# Altium PCB Relay_Mux.PcbDoc
Units mil, origin at the board's own origin, x right, y up, seen from the top; angles counter-clockwise.
Board outline 4325 x 2830 mil, 4 copper layers (Component Side, Ground Plane, Power Plane, Solder Side), stack 33.234 mil thick; 71 components, 99 nets, 327 pads, 30 vias.
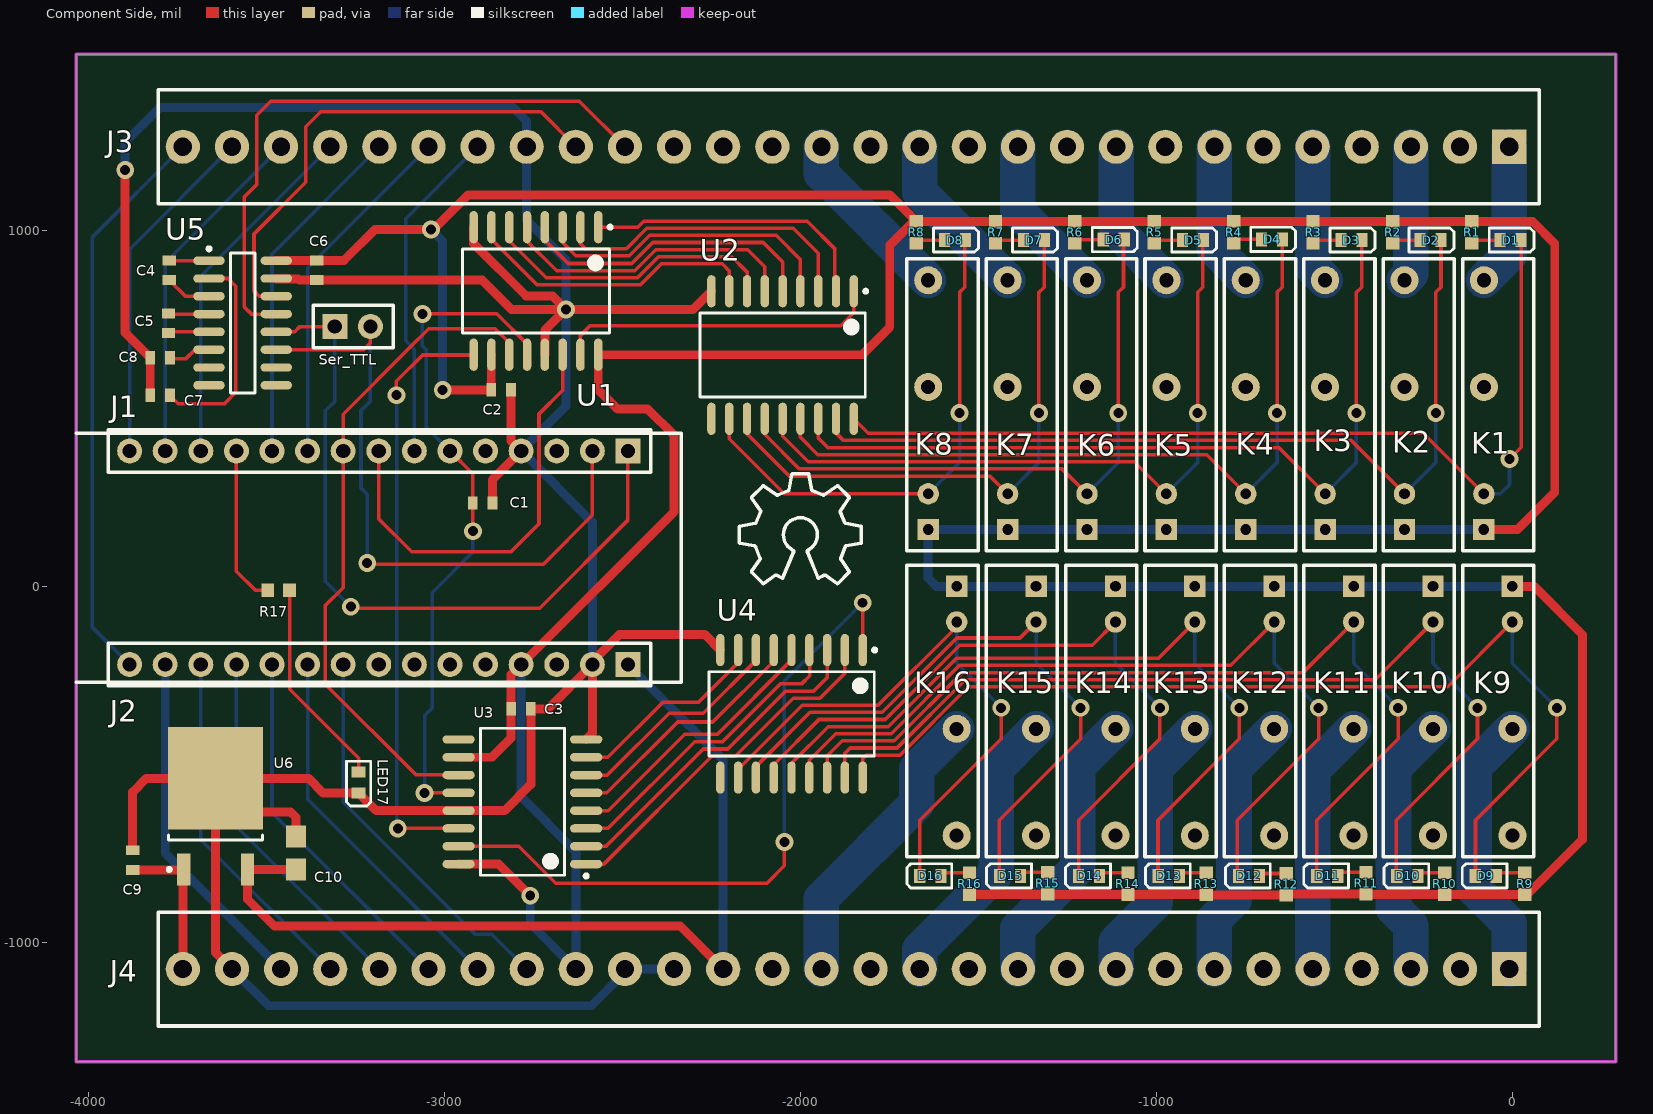
[diagram p0: Component Side view]
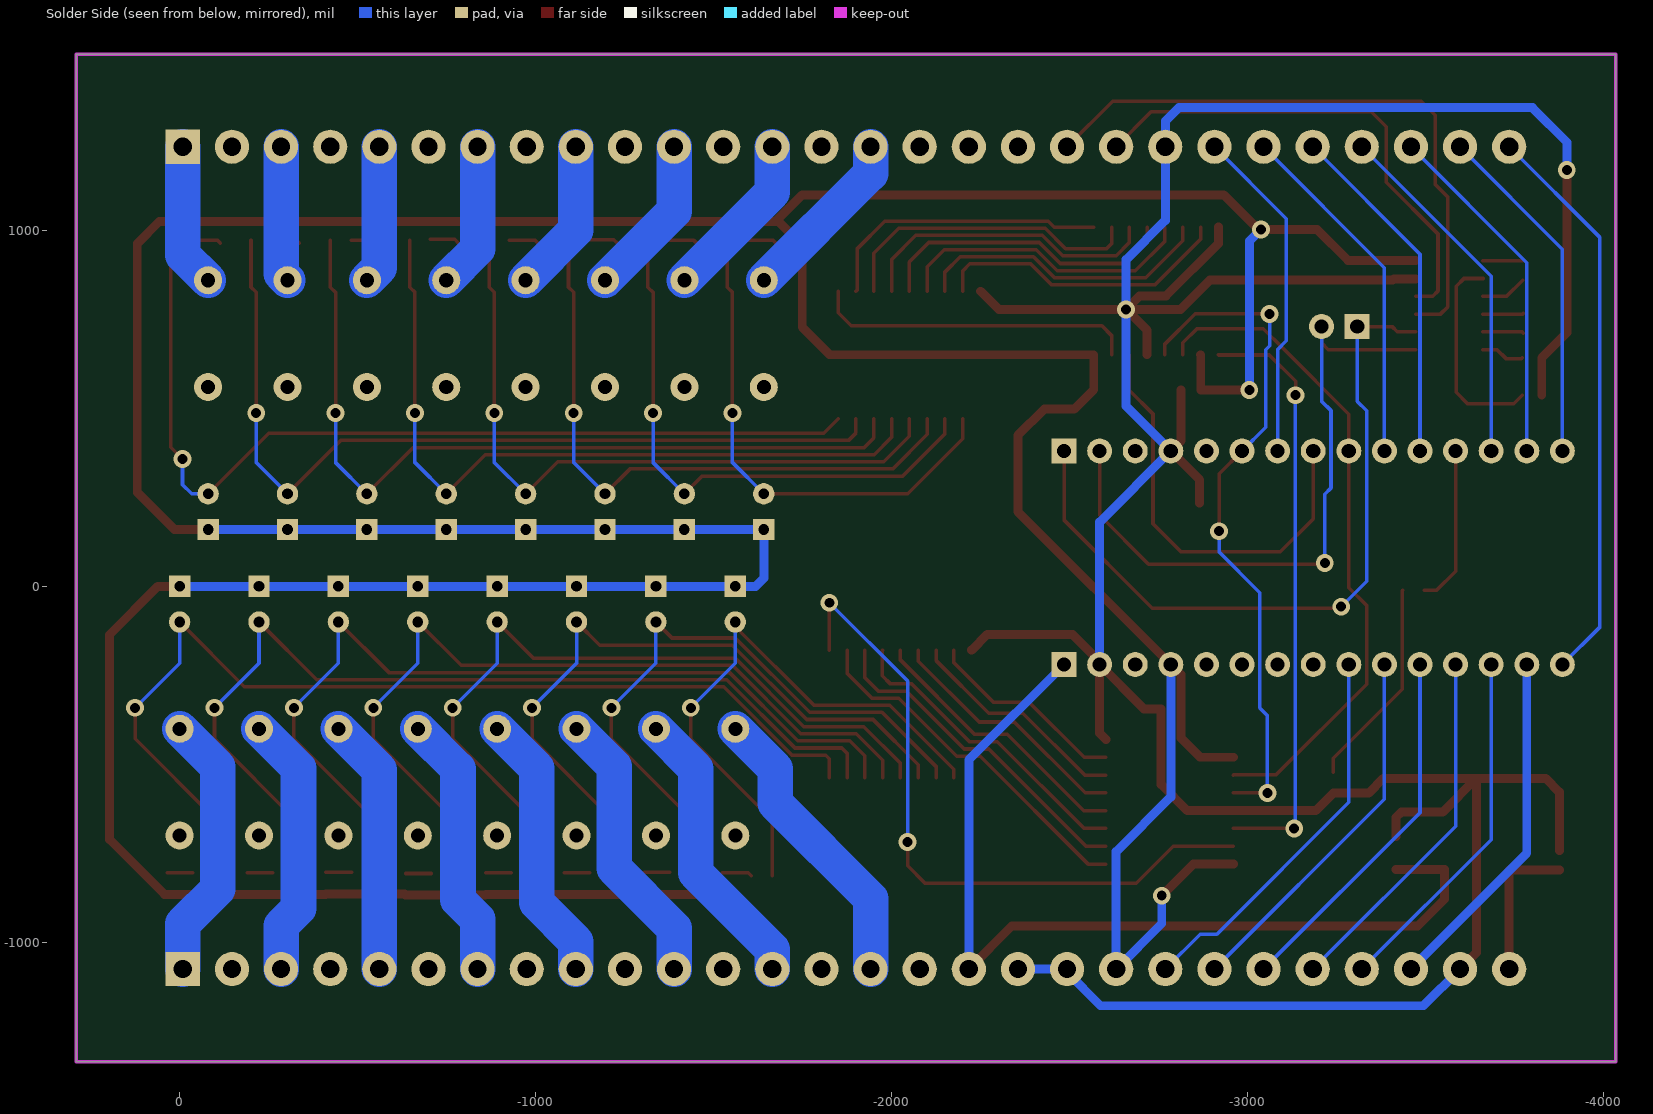
[diagram p1: Solder Side view, seen from below]
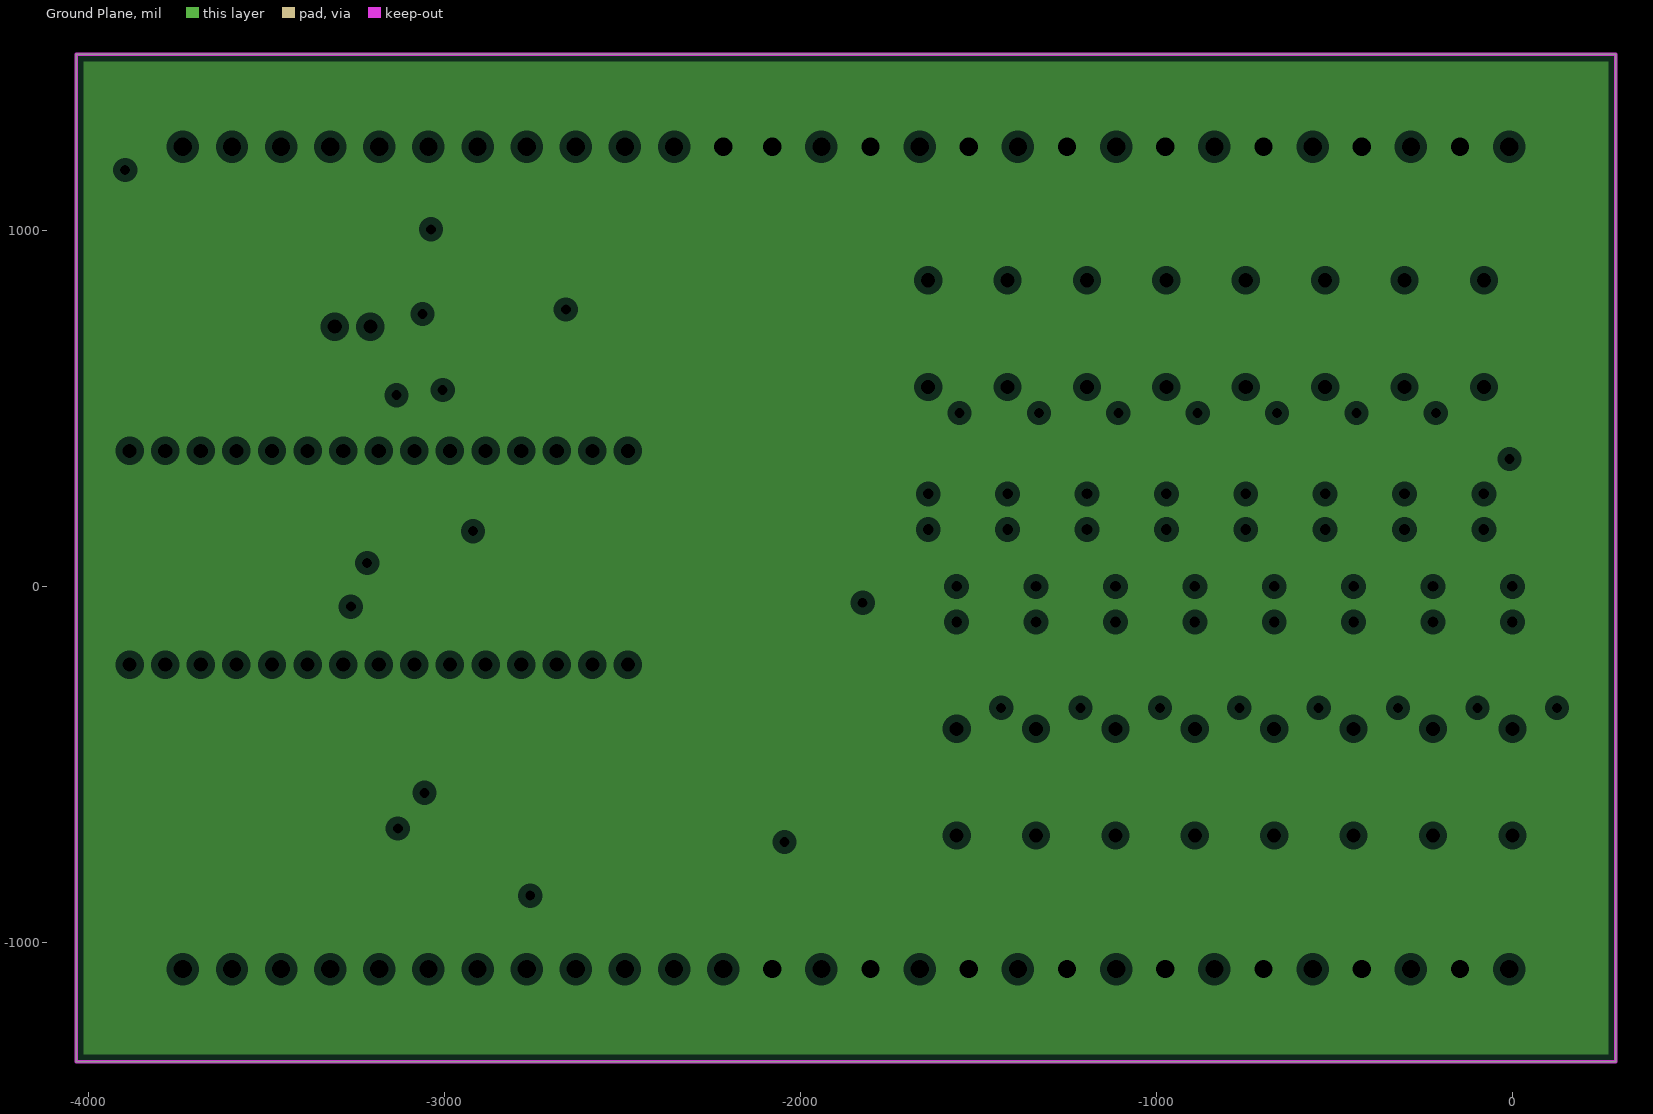
[diagram p2: Ground Plane, clearances drawn from the general rule]
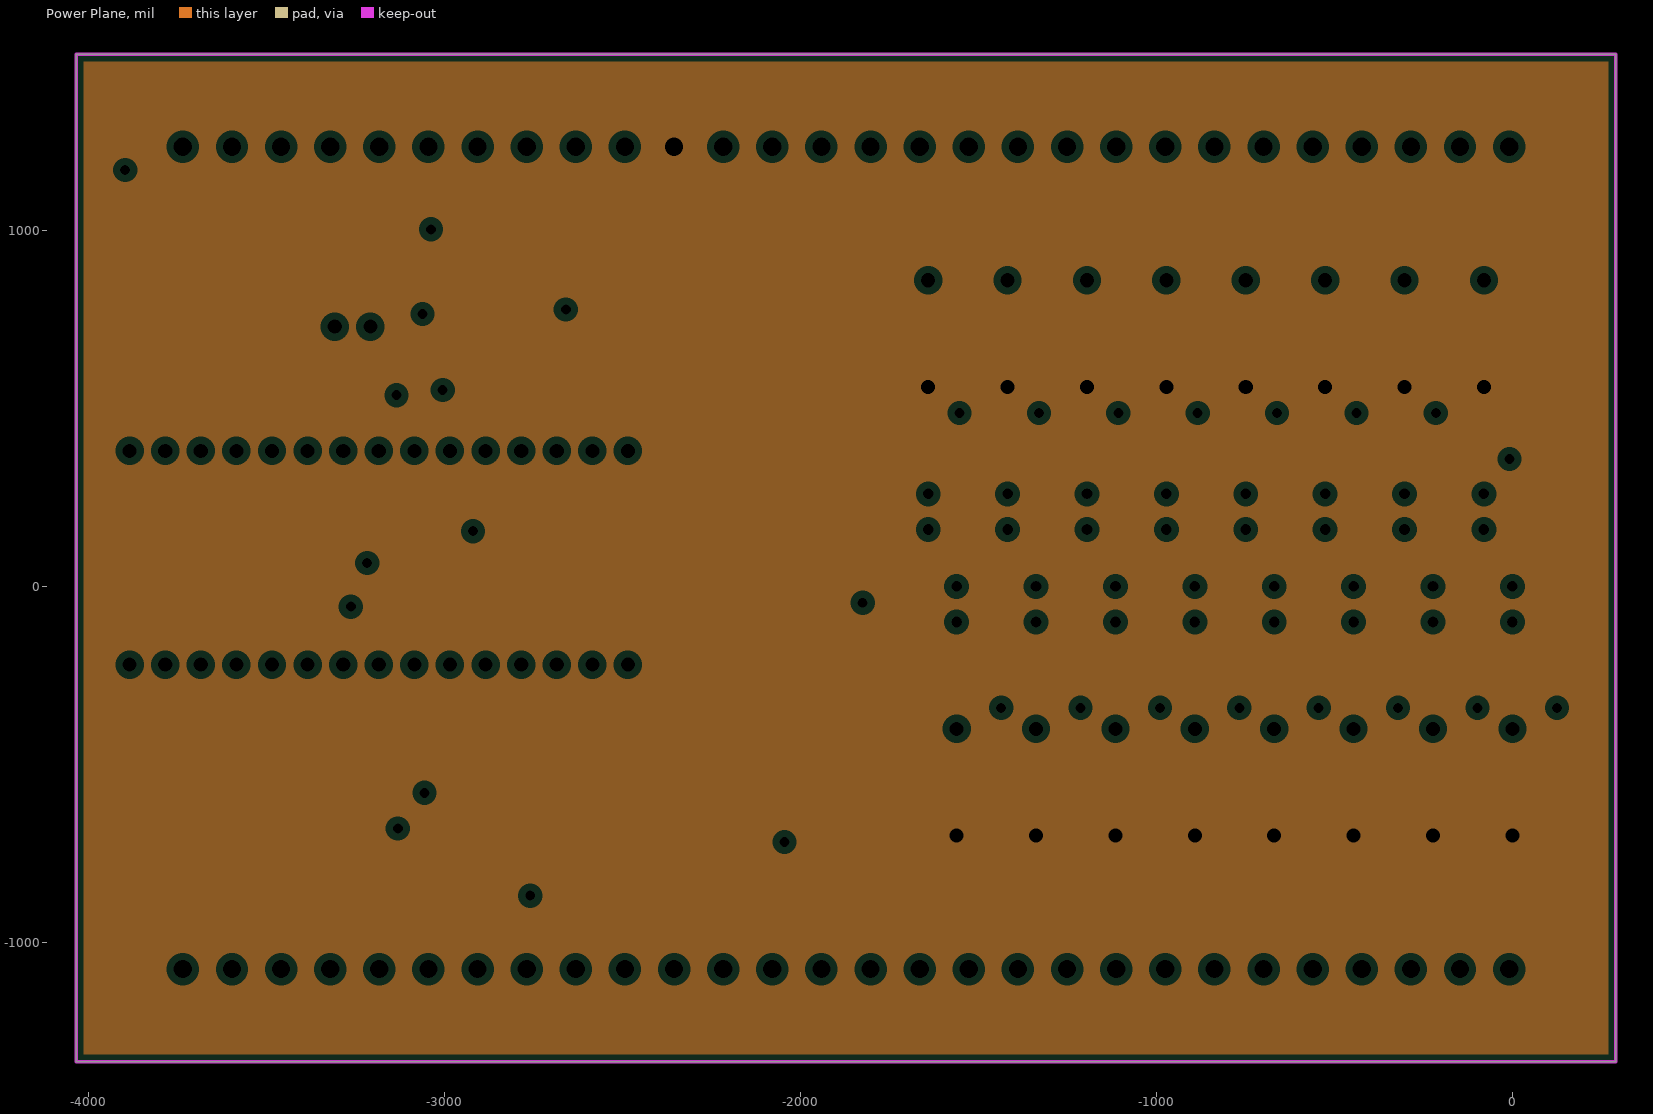
[diagram p3: Power Plane, clearances drawn from the general rule]

## Layer stack, top to bottom
Top Solder: solder mask 0.4, Solder Resist, Dk 3.5
Component Side: signal copper 1.4
Input: core 12.6, FR-4, Dk 4.8
Ground Plane: plane copper 1.417, net COM
Dielectric 3: prepreg 5, Dk 4.2
Power Plane: plane copper 1.417, net INPUT
Com: core 10, Dk 4.2
Solder Side: signal copper 1.4
Bottom Solder: solder mask 0.4, Solder Resist, Dk 3.5

## Board outline
-4034.5,-1335 -4034.5,1495 290.5,1495 290.5,-1335

## Design rules (kind name [scope] priority, off if disabled: settings)
Clearance [All] p1: gap=10
PlaneClearance [All] p1: clearance=20
PlaneConnect [All] p1: planeconnectstyle=Relief reliefexpansion=20 reliefentries=4 reliefconductorwidth=10 reliefairgap=10
PolygonConnect [All] p1: connectstyle=Relief reliefconductorwidth=10 reliefentries=4 polygonreliefangle="90 Angle" airgapwidth=10
RoutingVias [All] p1: holewidth=28 width=50 viastyle="Through Hole" minholewidth=28 minwidth=50 maxholewidth=28 maxwidth=50
SilkToBoardRegionClearance [InNet(Input)] p1:
SilkToSilkClearance [All] p1: silktosilkclearance=8
SolderMaskExpansion [All] p1: expansion=4
Width Width_serial [InNet('RS232TX')Or InNet('RS232RX')] p1: maxlimit=10 minlimit=10 preferedwidth=10
Width Width_Signal [InNet(OUT1)Or InNet(OUT2)Or InNet(OUT3)Or InNet(OUT4)Or InNet(OUT5)Or InNet(OUT6)Or InNet(OUT7)Or InNet(OUT8)Or InNet(OUT9)Or InNet(OUT10)Or InNet(OUT11)Or InNet(OUT12)Or InNet(OUT13)Or InNet(OUT14)Or InNet(OUT15)Or InNet(OUT16)Or InNet(Q0)Or InNet(Q1)Or InNet(Q2)Or InNet(Q3)Or InNet(Q4)Or InNet(Q5)Or InNet(Q6)Or InNet(Q7)Or InNet(Q8)Or InNet(Q9)Or InNet(Q10)Or InNet(Q11)Or InNet(Q12)Or InNet(Q13)Or InNet(Q14)Or InNet(Q15)Or InNet(NetD16_1)Or InNet(NetD15_1)Or InNet(NetD14_1)Or InNet(NetD13_1)Or InNet(NetD12_1)Or InNet(NetD11_1)Or InNet(NetD10_1)Or InNet(NetD9_1)Or InNet(NetD8_1)Or InNet(NetD7_1)Or InNet(NetD6_1)Or InNet(NetD5_1)Or InNet(NetD4_1)Or InNet(NetD3_1)Or InNet(NetD2_1)Or InNet(NetD1_1)Or InNet(D0)Or InNet(D1)Or InNet(D2)Or InNet(D3)Or InNet(D4)Or InNet(D5)Or InNet(D6)Or InNet(D7)Or InNet(D8)Or InNet(D9)Or InNet(D10)Or InNet(D11)Or InNet(D12)Or InNet(D13)Or InNet(D14)Or InNet(D15)Or InNet(SH_CP)Or InNet(ST_CP)Or InNet(DS)Or InNet(NetLED17_1)Or InNet(NetC7_1)Or InNet(NetC8_1)Or InNet(AREF)Or InNet(A0)Or InNet(A1)Or InNet(A2)Or InNet(A3)] p2: maxlimit=10 minlimit=10 preferedwidth=10
Width Width_Pwr [InNet(GND)Or InNet(VCC)Or InNet(VIN)] p3: maxlimit=25 minlimit=25 preferedwidth=25
Width Width_Contacts [InNet(Input)Or InNet(Com)Or InNet(Ch1)Or InNet(Ch2)Or InNet(Ch3)Or InNet(Ch4)Or InNet(Ch5)Or InNet(Ch6)Or InNet(Ch7)Or InNet(Ch8)Or InNet(Ch9)Or InNet(Ch10)Or InNet(Ch11)Or InNet(Ch10)Or InNet(Ch11)Or InNet(Ch12)Or InNet(Ch13)Or InNet(Ch14)Or InNet(Ch15)Or InNet(Ch16)] p4: maxlimit=100 minlimit=100 preferedwidth=100
25 further rules are at their usual default settings.

## Components (designator, comment, footprint, x,y, rotation, side; value= is the part's Value field where it differs from the comment)
C1 "Cap" 0603_Capacitor -2893,234 r180 top
C2 "Cap" 0603_Capacitor -2841,552 r180 top
C3 "Cap" 0603_Capacitor -2785,-344 r180 top
C4 "Cap" 0603_Capacitor -3773,888 r90 top
C5 "Cap" 0603_Capacitor -3775,739 r90 top
C6 "Cap" 0603_Capacitor -3359,888 r270 top
C7 "Cap" 0603_Capacitor -3799,537 r180 top
C8 "Cap" 0603_Capacitor -3799,642 r180 top
C9 "Cap" 0603_Capacitor -3876,-769 r90 top
C10 "Cap" 0805_cap_CAPC3013X10N -3417,-749 r90 top
D1 "LED3" LITE_ON_LED -5,973 r0 top
D2 "LED3" LITE_ON_LED -230,973 r0 top
D3 "LED3" LITE_ON_LED -452,973 r0 top
D4 "LED3" LITE_ON_LED -675,975 r0 top
D5 "LED3" LITE_ON_LED -897,973 r0 top
D6 "LED3" LITE_ON_LED -1120,974 r0 top
D7 "LED3" LITE_ON_LED -1344,973 r0 top
D8 "LED3" LITE_ON_LED -1566,973 r0 top
D9 "LED3" LITE_ON_LED -75,-813 r180 top
D10 "LED3" LITE_ON_LED -295,-813 r180 top
D11 "LED11" LITE_ON_LED -520,-813 r180 top
D12 "LED3" LITE_ON_LED -740,-813 r180 top
D13 "LED3" LITE_ON_LED -965,-813 r180 top
D14 "LED3" LITE_ON_LED -1189,-813 r180 top
D15 "LED3" LITE_ON_LED -1411,-813 r180 top
D16 "LED3" LITE_ON_LED -1635,-813 r180 top
J1 "J1_Nano" "J1, J2 - Arduino Nano" -3184.5,380.5 r270 top
J2 "J2_Nano" "J1, J2 - Arduino Nano" -3184.5,-219.5 r270 top
J3 "J3" Term_Block_Amphenol_20020327 -9,1235 r270 top
J4 "J4" Term_Block_Amphenol_20020327 -9,-1075 r270 top
K1 "K*" "Relay_G6DN-1A DC5" -80,860 r90 top
K2 "K*" "Relay_G6DN-1A DC5" -303,860 r90 top
K3 "K*" "Relay_G6DN-1A DC5" -526,860 r90 top
K4 "K*" "Relay_G6DN-1A DC5" -749,860 r90 top
K5 "K*" "Relay_G6DN-1A DC5" -972,860 r90 top
K6 "K*" "Relay_G6DN-1A DC5" -1195,860 r90 top
K7 "K*" "Relay_G6DN-1A DC5" -1418,860 r90 top
K8 "K*" "Relay_G6DN-1A DC5" -1641,860 r90 top
K9 "K*" "Relay_G6DN-1A DC5" 0,-700 r270 top
K10 "K*" "Relay_G6DN-1A DC5" -223,-700 r270 top
K11 "K*" "Relay_G6DN-1A DC5" -446,-700 r270 top
K12 "K*" "Relay_G6DN-1A DC5" -669,-700 r270 top
K13 "K*" "Relay_G6DN-1A DC5" -892,-700 r270 top
K14 "K*" "Relay_G6DN-1A DC5" -1115,-700 r270 top
K15 "K*" "Relay_G6DN-1A DC5" -1338,-700 r270 top
K16 "K*" "Relay_G6DN-1A DC5" -1561,-700 r270 top
LED17 "LED3" LITE_ON_LED -3241,-551 r270 top
R1 "Res3" 0603_Resistor -114,995 r270 top
R2 "Res3" 0603_Resistor -336,995 r270 top
R3 "Res3" 0603_Resistor -560,995 r270 top
R4 "Res3" 0603_Resistor -783,995 r270 top
R5 "Res3" 0603_Resistor -1006,995 r270 top
R6 "Res3" 0603_Resistor -1229,995 r270 top
R7 "Res3" 0603_Resistor -1452,995 r270 top
R8 "Res3" 0603_Resistor -1675,995 r270 top
R9 "Res3" 0603_Resistor 35,-835 r90 top
R10 "Res3" 0603_Resistor -190,-835 r90 top
R11 "Res3" 0603_Resistor -411,-834 r90 top
R12 "Res3" 0603_Resistor -635,-837 r90 top
R13 "Res3" 0603_Resistor -860,-835 r90 top
R14 "Res3" 0603_Resistor -1080,-835 r90 top
R15 "Res3" 0603_Resistor -1305,-834 r90 top
R16 "Res3" 0603_Resistor -1525,-835 r90 top
R17 "Res3" 0603_Resistor -3466,-11 r0 top
Ser_TTL "Ser_TTL" Ser_TTL -3308,730 r270 top
U1 "74HC595" 16Pin_SOIC127P1030X265-16N -2743,830 r270 top
U2 "ULN2803" 18Pin_SOIC127P1030X265-18N -2050,650 r270 top
U3 "74HC595" 16Pin_SOIC127P1030X265-16N -2781,-605 r180 top
U4 "ULN2803" 18Pin_SOIC127P1030X265-18N -2025,-358 r270 top
U5 "MAX3232" "16 pin SOIC - MAX3232 - SOIC127P600X175-16N" -3567,740 r0 top
U6 "MC78M12" "MC78M12 footprint - linear regulator - DPAK228P992X238-3N" -3643,-618 r90 top

## Footprints (in the part's own frame and the unit in brackets; to place one, negate y for a bottom-side part, rotate by r counter-clockwise, add the part's x,y. Pads: shape width x height; smd on the part's side, far side on the other; paste and mask are expansions set on the pad)
"16 pin SOIC - MAX3232 - SOIC127P600X175-16N" [mm] "SOIC, 16-Leads, Body 9.89x3.91mm, Pitch 1.27mm, IPC Medium Density"
  oval 2.25x0.6 smd: 1(-2.4,4.445) 2(-2.4,3.175) 3(-2.4,1.905) 4(-2.4,0.635) 5(-2.4,-0.635) 6(-2.4,-1.905) 7(-2.4,-3.175) 8(-2.4,-4.445) 9(2.4,-4.445) 10(2.4,-3.175) 11(2.4,-1.905) 12(2.4,-0.635) 13(2.4,0.635) 14(2.4,1.905) 15(2.4,3.175) 16(2.4,4.445)
  silkscreen extent -2.52,-5 0.87,5.42, body extent -2,-5 2,5, height 1.75
16Pin_SOIC127P1030X265-16N [mm] "SOIC, 16-Leads, Body 10.30x7.50mm, Pitch 1.27mm, IPC Medium Density"
  oval 2.3x0.6 smd: 1(-4.55,4.445) 2(-4.55,3.175) 3(-4.55,1.905) 4(-4.55,0.635) 5(-4.55,-0.635) 6(-4.55,-1.905) 7(-4.55,-3.175) 8(-4.55,-4.445) 9(4.55,-4.445) 10(4.55,-3.175) 11(4.55,-1.905) 12(4.55,-0.635) 13(4.55,0.635) 14(4.55,1.905) 15(4.55,3.175) 16(4.55,4.445)
  silkscreen extent -4.67,-5.25 3,5.42, body extent -3.8,-5.25 3.8,5.25, height 2.65
18Pin_SOIC127P1030X265-18N [mm] "SOIC, 18-Leads, Body 11.55x7.50mm, Pitch 1.27mm, IPC Medium Density"
  oval 2.3x0.6 smd: 1(-4.55,5.08) 2(-4.55,3.81) 3(-4.55,2.54) 4(-4.55,1.27) 5(-4.55,0) 6(-4.55,-1.27) 7(-4.55,-2.54) 8(-4.55,-3.81) 9(-4.55,-5.08) 10(4.55,-5.08) 11(4.55,-3.81) 12(4.55,-2.54) 13(4.55,-1.27) 14(4.55,0) 15(4.55,1.27) 16(4.55,2.54) 17(4.55,3.81) 18(4.55,5.08)
  silkscreen extent -4.67,-5.9 3,6.06, body extent -3.8,-5.9 3.8,5.9, height 2.65
0603_Capacitor [mm]
  rect 0.7x0.95 smd: 1(-0.7,0) 2(0.7,0)
  body extent -0.83,-0.43 0.82,0.43, height 0.6
0603_Resistor [mm]
  rect 0.9x0.95 smd: 1(-0.775,0) 2(0.775,0)
  body extent -0.87,-0.47 0.88,0.48, height 0.6
0805_cap_CAPC3013X10N [mm] "Chip Capacitor, 2-Leads, Body 3.00x1.27mm, IPC Medium Density"
  rect 1.55x1.45 smd: 1(-1.175,0) 2(1.175,0)
  body extent -1.55,-0.7 1.55,0.7, height 1
"J1, J2 - Arduino Nano" [mil]
  rect 70x70 hole 40: 1(0,700)
  round 70 hole 40: 2(0,600) 3(0,500) 4(0,400) 5(0,300) 6(0,200) 7(0,100) 8(0,0) 9(0,-100) 10(0,-200) 11(0,-300) 12(0,-400) 13(0,-500) 14(0,-600) 15(0,-700)
  silkscreen extent -60,-760 60,764
LITE_ON_LED [mm]
  rect 0.8x1 smd: 1(-0.75,0) 2(0.75,0)
  silkscreen extent -1.52,-0.86 1.68,0.86
"MC78M12 footprint - linear regulator - DPAK228P992X238-3N" [mm] "D-PAK, 3-Pads, Body 6.21x6.73mm (max), IPC Medium Density"
  rect 2.3x0.95 smd: 1(-4.5,2.28) 3(-4.5,-2.28)
  rect 7.3x6.8 smd: 2(2,0)
  silkscreen extent -4.62,-3.35 -2.05,3.43, body extent -2.4,-3.37 3.82,3.37, height 2.38
"Relay_G6DN-1A DC5" [mil]
  rect 60x60 hole 30: 1(-700,0)
  round 60 hole 30: 2(-600,0)
  round 78.74 hole 39.37: 5(-300,0) 8(0,0)
  silkscreen extent -760,-140 60,60
Ser_TTL [mil]
  rect 70x70 hole 40: 1(0,0)
  round 70 hole 40: 2(0,100)
  silkscreen extent -60,-60 60,164
Term_Block_Amphenol_20020327 [mil] "24 pos, 3.81 mm pitch, screw term"
  rect 96x96 hole 51: 1(0,0)
  round 96 hole 51: 2(0,-138) 3(0,-276) 4(0,-414) 5(0,-552) 6(0,-690) 7(0,-828) 8(0,-966) 9(0,-1104) 10(0,-1242) 11(0,-1380) 12(0,-1518) 13(0,-1656) 14(0,-1794) 15(0,-1932) 16(0,-2070) 17(0,-2208) 18(0,-2346) 19(0,-2484) 20(0,-2622) 21(0,-2760) 22(0,-2898) 23(0,-3036) 24(0,-3174) 25(0,-3312) 26(0,-3450) 27(0,-3588) 28(0,-3726)
  silkscreen extent -160,-3795 160,84

## Part data
C1 C2 C3 C4 C5 C6 C7 C8 C9 C10: "Capacitor"
D1 D2 D3 D4 D5 D6 D7 D8 D9 D10 D12 D13 D14 D15 D16 LED17: "Typical BLUE SiC LED"
D11: library part LED3, "Typical BLUE SiC LED"
J1: library part J1, "J1 on Arduino Nano"
J2: library part J2, "J2 on Arduino Nano"
K1 K2 K3 K4 K5 K6 K7 K8 K9 K10 K11 K12 K13 K14 K15 K16: library part "Relay_G6DN-1A DC5", "Relay, SPST, 5V"
R1 R2 R3 R4 R5 R6 R7 R8 R9 R10 R11 R12 R13 R14 R15 R16 R17: "Resistor"
U6: library part "Volt Reg", "Voltage Regulator"

## Via types
v1: diameter 50, hole 28, Component Side to Solder Side, 30 vias

## Nets (pads, with @x,y where several pads share a name; then routed paths per layer and width w, separated by ;. In a path a pad name is that pad's centre, name@x,y a point inside that pad or via, vN(x,y) a via of type N, cw(c..) or ccw(c..) an arc to the next point about the centre after c; other vN are vias at no path point)
3V3: J2.14 J4.26 | length 990.3
  Solder Side w25: J2.14 -3784.5,-749.5 J4.26
A0: J2.12 J4.24 | length 1021.8
  Solder Side w10: J2.12 -3584.5,-673.5 J4.24
A1: J2.11 J4.23 | length 1037.5
  Solder Side w10: J2.11 -3484.5,-635.5 J4.23
A2: J2.10 J4.22 | length 1053.3
  Solder Side w10: J2.10 -3384.5,-597.5 J4.22
A3: J2.9 J4.21 | length 1096.6
  Solder Side w10: J2.9 -3284.5,-606.5 -2914,-977 -2867,-977 J4.21
AREF: J2.13 J4.25 | length 1006.1
  Solder Side w10: J2.13 -3684.5,-711.5 J4.25
CH1: J3.1 K1.8 | length 404.4
  Solder Side w100: K1.8 -9,931 J3.1
CH2: J3.3 K2.8 | length 382.5
  Solder Side w100: K2.8 -285,878 J3.3
CH3: J3.5 K3.8 | length 389.5
  Solder Side w100: J3.5 -561,895 K3.8
CH4: J3.7 K4.8 | length 411.5
  Solder Side w100: J3.7 -837,948 K4.8
CH5: J3.9 K5.8 | length 433.4
  Solder Side w100: J3.9 -1113,1001 K5.8
CH6: J3.11 K6.8 | length 455.4
  Solder Side w100: J3.11 -1389,1054 K6.8
CH7: J3.13 K7.8 | length 477.3
  Solder Side w100: J3.13 -1665,1107 K7.8
CH8: J3.15 K8.8 | length 499.3
  Solder Side w100: J3.15 -1941,1160 K8.8
CH9: J4.1 K9.5 | length 759.9
  Solder Side w100: J4.1 -9,-948 -107,-850 -107,-507 K9.5
CH10: J4.3 K10.5 | length 741.3
  Solder Side w100: J4.3 -285,-953 -334,-904 -334,-511 K10.5
CH11: J4.5 K11.5 | length 722.6
  Solder Side w100: J4.5 -561,-515 K11.5
CH12: J4.7 K12.5 | length 744.6
  Solder Side w100: J4.7 -837,-935 -782,-880 -782,-513 K12.5
CH13: J4.9 K13.5 | length 766.5
  Solder Side w100: J4.9 -1113,-998 -1003,-888 -1003,-511 K13.5
CH14: J4.11 K14.5 | length 788.5
  Solder Side w100: J4.11 -1389,-960 -1221,-792 -1221,-506 K14.5
CH15: J4.13 K15.5 | length 810.4
  Solder Side w100: J4.13 -1665,-1020 -1450,-805 -1450,-512 K15.5
CH16: J4.15 K16.5 | length 832.4
  Solder Side w100: J4.15 -1941,-877 -1673,-609 -1673,-512 K16.5
COM: J3.2 J3.4 J3.6 J3.8 J3.10 J3.12 J3.14 J3.16 J3.17 J4.2 J4.4 J4.6 J4.8 J4.10 J4.12 J4.14 J4.16
D0: J1.2 Ser_TTL.2 U5.11 | length 1872.7
  Component Side w10: U5.11 -3227,665 -3208,684 Ser_TTL.2 ; v1(-3217,66) -3213,62 -2722,62 -2584.5,199.5 J1.2
  Solder Side w10: v1(-3217,66) -3217,259 -3234.5,276.5 -3234.5,494 -3208,520.5 Ser_TTL.2
D1: J1.1 Ser_TTL.1 U5.12 | length 2073.3
  Component Side w10: U5.12 -3421,715 -3406,730 Ser_TTL.1 ; v1@-3263,-61 -2732,-61 -2484.5,186.5 J1.1
  Solder Side w10: Ser_TTL.1 -3308,519.5 -3334.5,493 -3334.5,14.5 v1(-3263,-57)
D4: J1.7 J3.22 | length 948.3
  Solder Side w10: J1.7 -3084.5,665.5 -3109,690 -3109,1033 J3.22
D7: J1.10 J3.23 | length 995.1
  Solder Side w10: J1.10 -3384.5,895.5 J3.23
D8: J1.11 J3.24 | length 979.4
  Solder Side w10: J1.11 -3484.5,933.5 J3.24
D9: J1.12 R17.1 | length 448.2
  Component Side w10: J1.12 -3584.5,42.5 -3531,-11 R17.1
D10: J1.13 J3.25 | length 1005.1
  Solder Side w10: J1.13 -3684.5,871.5 J3.25
D11: J1.14 J3.26 | length 989.3
  Solder Side w10: J1.14 -3784.5,909.5 J3.26
D12: J1.15 J3.27 | length 973.6
  Solder Side w10: J1.15 -3884.5,947.5 J3.27
D13: J2.15 J3.28 | length 1603.8
  Solder Side w10: J2.15 -3990,-114 -3990,980 J3.28
DS: J1.8 U1.14 | length 1214.7
  Component Side w10: J1.8 -3184.5,189.5 -3092,97 -2813,97 -2734.5,175.5 -2734.5,484.5 -2668,551 U1.14
GND: C1.1 C2.1 C3.1 C6.2 C7.2 C8.2 C9.2 C10.2 J1.4 J2.2 J3.21 J4.18 J4.19 J4.27 LED17.2 U1.8 U1.13 U2.9 U3.8 U3.13 U4.9 U5.15 U6.2 | length 10458.1
  Component Side w25: v1@-3898,1170 -3898,713.44 C8.2 C7.2 ; C9.2 -3876,-578 -3837.26,-539.26 U6.2 ; J4.27 -3643,-1029 U6.2 ; U5.15@-3471.51,864 -3411,864 -3407.44,860.44 C6.2 -2894.44,860.44 -2812,778 v1(-2659,778) ; C10.2 -3417,-649 -3432,-634 -3548.26,-634 U6.2 ; U1.8 -2918,963 -2771,816 -2697,816 v1(-2659,778) ; C1.1 -2865.44,299.56 J1.4 -2813.44,409.44 C2.1 ; U1.13 -2718,719 v1(-2659,778) ; U3.8 -2584.5,-412.63 J2.2 ; U2.9 -2301.13,778 v1(-2659,778) ; U4.9 -2268.87,-135 -2508,-135 -2584.5,-211.5 J2.2 ; U6.2 -3381.74,-539.26 -3340.47,-580.53 LED17.2 -3191.53,-630 U3.13 -2831,-630 -2757.44,-556.44 C3.1 -2709,-344 J2.2
  Solder Side w25: v1(-3897,1170) -3898,1171 -3898,1247 -3800,1345 -2807,1345 -2769,1307 J3.21 -2769,1028 -2659,918 v1(-2659,778) -2659,506 J1.4 -2584.5,180.5 J2.2 ; J4.27 -3494,-1178 -2587,-1178 -2493,-1084 J4.19 J4.18
INPUT: J3.18 K1.5 K2.5 K3.5 K4.5 K5.5 K6.5 K7.5 K8.5 K9.8 K10.8 K11.8 K12.8 K13.8 K14.8 K15.8 K16.8
NetC4_1: C4.1 U5.3 | length 130.3
  Component Side w10: C4.1 -3727.56,815 U5.3
NetC4_2: C4.2 U5.1 | length 111.7
  Component Side w10: C4.2 -3772.44,915 U5.1
NetC5_1: C5.1 U5.5 | length 115
  Component Side w10: C5.1 -3771.44,715 U5.5
NetC5_2: C5.2 U5.4 | length 114.2
  Component Side w10: C5.2 -3773.44,765 U5.4
NetC7_1: C7.1 U5.2 | length 591.2
  Component Side w10: C7.1 -3747.44,513 -3618,513 -3586,545 -3586,843 -3608,865 U5.2
NetC8_1: C8.1 U5.6 | length 121.1
  Component Side w10: C8.1 -3769.44,640 -3726,640 -3701,665 U5.6
NetD1_1: D1.1 R1.2 | length 83
  Component Side w10: R1.2 -105.48,973 D1.1
NetD2_1: D2.1 R2.2 | length 80
  Component Side w10: R2.2 -327.48,973 D2.1
NetD3_1: D3.1 R3.2 | length 82
  Component Side w10: R3.2 -551.48,973 D3.1
NetD4_1: D4.1 R4.2 | length 82.8
  Component Side w10: R4.2 -772.48,975 D4.1
NetD5_1: D5.1 R5.2 | length 83
  Component Side w10: R5.2 -997.48,973 D5.1
NetD6_1: D6.1 R6.2 | length 83.4
  Component Side w10: R6.2 -1219.48,974 D6.1
NetD7_1: D7.1 R7.2 | length 82
  Component Side w10: R7.2 -1443.48,973 D7.1
NetD8_1: D8.1 R8.2 | length 83
  Component Side w10: R8.2 -1666.48,973 D8.1
NetD9_1: D9.1 R9.2 | length 72
  Component Side w10: D9.1@-36.96,-804.49 R9.2
NetD10_1: D10.1 R10.2 | length 72
  Component Side w10: D10.1@-261.96,-804.49 R10.2
NetD11_1: D11.1 R11.2 | length 72
  Component Side w10: D11.1@-482.96,-803.49 R11.2
NetD12_1: D12.1 R12.2 | length 72
  Component Side w10: D12.1@-706.96,-806.49 R12.2
NetD13_1: D13.1 R13.2 | length 72
  Component Side w10: D13.1@-931.96,-804.49 R13.2
NetD14_1: D14.1 R14.2 | length 72
  Component Side w10: D14.1@-1151.96,-804.49 R14.2
NetD15_1: D15.1 R15.2 | length 72
  Component Side w10: D15.1@-1376.96,-803.49 R15.2
NetD16_1: D16.1 R16.2 | length 84
  Component Side w10: D16.1 -1596.96,-804.49 R16.2
NetLED17_1: LED17.1 R17.2 | length 591
  Component Side w10: R17.2 -3434.5,-11.98 -3434.5,-288.98 -3241,-482.48 LED17.1
NetU1_9: U1.9 U3.14 | length 1676.3
  Component Side w10: v1(-3135,537) -3135,576 -3061,650 -2918.87,650 U1.9 ; v1(-3131,-680) U3.14
  Solder Side w10: v1@-3134.5,537 -3134.5,-676.5 v1(-3131,-680)
OUT1: D1.2 K1.2 U2.18 | length 2640.6
  Component Side w10: U2.18 -1809.13,430 -250,430 K1.2 ; v1(-8,358) 24.53,390.53 D1.2
  Solder Side w10: K1.2 -34,260 -8,286 v1(-8,358)
OUT2: D2.2 K2.2 U2.17 | length 2463.2
  Component Side w10: U2.17 -1900,431 -1879,410 -453,410 K2.2 ; v1(-215,487) -215,826 -200.47,840.53 D2.2
  Solder Side w10: K2.2 -215,348 v1(-215,487)
OUT3: D3.2 K3.2 U2.16 | length 2298.4
  Component Side w10: U2.16 -1950,417 -1923,390 -656,390 K3.2 ; v1(-438,487) -438,826 -423.47,840.53 D3.2@-423.47,973
  Solder Side w10: K3.2 -438,348 v1(-438,487)
OUT4: D4.2 K4.2 U2.15 | length 2124.2
  Component Side w10: U2.15 -2000,419 -1951,370 -859,370 K4.2 ; v1(-661,487) -661,826 -646.47,840.53 D4.2@-646.47,973
  Solder Side w10: K4.2 -661,348 v1(-661,487)
OUT5: D5.2 K5.2 U2.14 | length 1949.4
  Component Side w10: U2.14 -2050,422 -1978,350 -1062,350 K5.2 ; v1(-884,487) -884,826 -869.47,840.53 D5.2@-869.47,973
  Solder Side w10: K5.2 -884,348 v1(-884,487)
OUT6: D6.2 K6.2 U2.13 | length 1773.5
  Component Side w10: U2.13 -2100,427 -2003,330 -1265,330 K6.2 ; v1(-1107,487) -1107,826 -1092.47,840.53 D6.2@-1092.47,973
  Solder Side w10: K6.2 -1107,348 v1(-1107,487)
OUT7: D7.2 K7.2 U2.12 | length 1599.3
  Component Side w10: U2.12 -2150,429 -2031,310 -1468,310 K7.2 ; v1(-1330,487) -1330,826 -1315.47,840.53 D7.2@-1315.47,973
  Solder Side w10: K7.2 -1330,348 v1(-1330,487)
OUT8: D8.2 K8.2 U2.11 | length 1435.3
  Component Side w10: U2.11 -2200,415 -2045,260 K8.2 ; v1(-1553,487) -1553,826 -1538.47,840.53 D8.2@-1538.47,973 ; D8.2@-1537,972.47 D8.2
  Solder Side w10: K8.2 -1553,348 v1(-1553,487)
OUT9: D9.2 K9.2 U4.18 | length 2896.6
  Component Side w10: U4.18 -1825,-484 -1815,-474 -1720.29,-474 -1528.29,-282 -182,-282 K9.2 ; D9.2@-103.53,-813 -103.53,-656.53 125,-428 v1(125,-341)
  Solder Side w10: K9.2 0,-216 v1(125,-341)
OUT10: D10.2 K10.2 U4.17 | length 2732.4
  Component Side w10: U4.17 -1875,-469 -1860,-454 -1728.58,-454 -1536.58,-262 -385,-262 K10.2 ; D10.2@-326.53,-813 -326.53,-656.53 -98,-428 v1(-98,-341)
  Solder Side w10: K10.2 -223,-216 v1(-98,-341)
OUT11: D11.2 K11.2 U4.16 | length 2555.3
  Component Side w10: U4.16 -1925,-476 -1883,-434 -1736.86,-434 -1544.86,-242 -588,-242 K11.2 ; D11.2 -549.53,-656.53 -321,-428 v1(-321,-341)
  Solder Side w10: K11.2 -446,-216 v1(-321,-341)
OUT12: D12.2 K12.2 U4.15 | length 2375.3
  Component Side w10: U4.15 -1975,-488 -1901,-414 -1745.15,-414 -1553.15,-222 -791,-222 K12.2 ; D12.2@-772.53,-813 -772.53,-656.53 -544,-428 v1(-544,-341)
  Solder Side w10: K12.2 -669,-216 v1(-544,-341)
OUT13: D13.2 K13.2 U4.14 | length 2197
  Component Side w10: U4.14 -2025,-497 -1922,-394 -1753.43,-394 -1561.43,-202 -994,-202 K13.2 ; D13.2@-995.53,-813 -995.53,-656.53 -767,-428 v1(-767,-341)
  Solder Side w10: K13.2 -892,-216 v1(-767,-341)
OUT14: D14.2 K14.2 U4.13 | length 2021.7
  Component Side w10: U4.13 -2075,-501 -1948,-374 -1761.72,-374 -1552.72,-165 -1180,-165 K14.2 ; D14.2 -1218.53,-656.53 -990,-428 v1(-990,-341)
  Solder Side w10: K14.2 -1115,-216 v1(-990,-341)
OUT15: D15.2 K15.2 U4.12 | length 1845.7
  Component Side w10: U4.12 -2125,-506 -1973,-354 -1770,-354 -1561,-145 -1383,-145 K15.2 ; D15.2@-1441.53,-813 -1441.53,-656.53 -1213,-428 v1(-1213,-341)
  Solder Side w10: K15.2 -1338,-216 v1(-1213,-341)
OUT16: D16.2 K16.2 U4.11 | length 1675.7
  Component Side w10: U4.11 -2175,-514 -1995,-334 -1782,-334 -1561,-113 K16.2 ; D16.2 -1664.53,-656.53 -1436,-428 v1(-1436,-341)
  Solder Side w10: K16.2 -1561,-216 v1(-1436,-341)
Q0: U1.15 U2.1 | length 908.8
  Component Side w10: U1.15 -2618,705 -2591,732 -1887,732 -1850,769 U2.1
Q1: U1.1 U2.2 | length 824.4
  Component Side w10: U1.1 -2456.85,1009.13 -2439.99,1026 -1981,1026 -1903,948 -1903,832.13 U2.2
Q2: U1.2 U2.3 | length 879.5
  Component Side w10: U1.2 -2618,963 -2603.86,948.86 -2488.84,948.86 -2431.7,1006 -2020,1006 -1950,936 U2.3
Q3: U1.3 U2.4 | length 867.2
  Component Side w10: U1.3 -2668,966 -2630.86,928.86 -2480.56,928.86 -2423.42,986 -2068,986 -2000,918 U2.4
Q4: U1.4 U2.5 | length 860.6
  Component Side w10: U1.4 -2718,973 -2652,907 -2474.13,907 -2415.13,966 -2104.87,966 -2050,911.13 U2.5
Q5: U1.5 U2.6 | length 854.7
  Component Side w10: U1.5 -2768,970 -2685,887 -2465.85,887 -2406.85,946 -2148,946 -2100,898 U2.6
Q6: U1.6 U2.7 | length 845.4
  Component Side w10: U1.6 -2818,971 -2714,867 -2457.57,867 -2398.57,926 -2192.87,926 -2150,883.13 U2.7
Q7: U1.7 U2.8 | length 844.7
  Component Side w10: U1.7 -2868,975 -2740,847 -2449.28,847 -2390.28,906 -2220,906 -2200,886 U2.8
Q8: U3.15 U4.1 | length 1941.5
  Component Side w10: U3.15 -2791,-730 -2687,-834 -2094,-834 -2045,-785 v1(-2045,-718) ; U4.1 v1(-1825,-46)
  Solder Side w10: v1(-2045,-718) -2045,-266 v1(-1825,-46)
Q9: U3.1 U4.2 | length 1014
  Component Side w10: U3.1 -2552,-780 -2248.86,-476.86 -2182.86,-476.86 -2020,-314 -1945,-314 -1875,-244 U4.2
Q10: U3.2 U4.3 | length 950.3
  Component Side w10: U3.2 -2546,-730 -2272.86,-456.86 -2203.86,-456.86 -2041,-294 -1963,-294 -1925,-256 U4.3
Q11: U3.3 U4.4 | length 878.1
  Component Side w10: U3.3 -2541,-680 -2297.19,-436.19 -2218.76,-436.19 -2056.57,-274 -1997,-274 -1974,-251 -1974,-179.87 U4.4
Q12: U3.4 U4.5 | length 780.2
  Component Side w10: U3.4 -2540,-630 -2325,-415 -2233,-415 -2025,-207 U4.5
Q13: U3.5 U4.6 | length 711.3
  Component Side w10: U3.5 -2544,-580 -2345,-381 -2246,-381 -2075,-210 U4.6
Q14: U3.6 U4.7 | length 639.4
  Component Side w10: U3.6 -2543,-530 -2369,-356 -2273,-356 -2125,-208 U4.7
Q15: U3.7 U4.8 | length 572.2
  Component Side w10: U3.7 -2541,-480 -2387,-326 -2287,-326 -2175,-214 U4.8
RS232RX: J3.20 U5.14 | length 1406.8
  Component Side w10: U5.14 -3520,815 -3535,830 -3535,990 -3390,1135 -3390,1291 -3348,1333 -2729,1333 J3.20
RS232TX: J3.19 U5.13 | length 1754.4
  Component Side w10: U5.13 -3542,765 -3562,785 -3562,1094 -3527,1129 -3527,1324 -3488,1363 -2621,1363 J3.19
SH_CP: J1.9 U1.11 U3.11 | length 1874.9
  Component Side w10: U3.11 -2961.13,-529 -3080,-529 -3334.5,-274.5 -3334.5,-53.5 -3284.5,-3.5 J1.9 -3284.5,483.78 -3098.28,670 -3098,670 -3044,724 -2858,724 -2818,684 U1.11
ST_CP: C1.2 J1.6 U1.12 U3.12 | length 1915.4
  Component Side w10: v1@-3062,766 -2853,766 -2768,681 U1.12 ; v1(-3056,-580) U3.12 ; J1.6 -2920.56,316.56 C1.2 -2920.56,155.56 v1(-2920,155)
  Solder Side w10: v1(-3062,765) -3062,676 -3051,665 -3051,447 J1.6 ; v1(-3056,-580) -3056,-363 -3034.5,-341.5 -3034.5,-17.5 -2920,97 v1(-2920,155)
VCC: C2.2 C3.2 C6.1 J2.4 J4.20 K1.1 K2.1 K3.1 K4.1 K5.1 K6.1 K7.1 K8.1 K9.1 K10.1 K11.1 K12.1 K13.1 K14.1 K15.1 K16.1 R1.1 R2.1 R3.1 R4.1 R5.1 R6.1 R7.1 R8.1 R9.1 R10.1 R11.1 R12.1 R13.1 R14.1 R15.1 R16.1 U1.10 U1.16 U3.10 U3.16 U5.16 | length 15518.1
  Component Side w25: U5.16 -3359.56,915 C6.1 -3282.44,915.56 -3195,1003 v1(-3038,1003) -3030,1003 -2933,1100 -1749.49,1100 R8.1 ; v1(-3005,552) C2.2 -2868.56,650.31 U1.10 ; U3.16 -2848,-780 v1(-2759,-869) ; U3.10 -2867,-480 -2812.56,-425.56 C3.2 -2812.56,-247.56 J2.4 -2355,210 -2355,424 -2429,498 -2513,498 -2568,553 U1.16 -1826.13,650.87 -1749,728 -1749,958.72 -1682.21,1025.51 R8.1 ; J4.20@-2644,-1075 J4.20 ; R16.1 R14.1 R13.1 -858,-867.51 R12.1 -632,-864.51 R11.1 -410,-865.51 R10.1 R9.1 42.21,-865.51 197,-710.72 197,-136 61,0 K9.1 ; K1.1 15,160 119,264 119,963 56.49,1025.51 R1.1 R2.1 R3.1 R4.1 R5.1 R6.1 R7.1 R8.1
  Solder Side w25: v1(-3038,1003) -3005,970 v1(-3005,552) ; J2.4 -2784.5,-591.5 -2631,-745 J4.20 -2759,-947 v1(-2759,-869) ; K1.1 K2.1 K3.1 K4.1 K5.1 K6.1 K7.1 K8.1 -1642,159 -1642,24 -1618,0 K16.1 K15.1 K14.1 K13.1 K12.1 K11.1 K10.1 K9.1
VIN: C10.1 J2.1 J4.17 U6.3 | length 2603.7
  Component Side w25: C10.1 -3553.14,-795.26 U6.3 -3553.24,-878.76 -3478,-954 -2338,-954 J4.17
  Solder Side w25: J2.1 -2217,-487 J4.17
VIN_(24V): C9.1 J4.28 U6.1 | length 418.9
  Component Side w25: C9.1 -3735.84,-796.56 -3735,-797.4 J4.28
pads on no net: J1.3 J1.5 J2.3 J2.5 J2.6 J2.7 J2.8 U2.10 U3.9 U4.10 U5.7 U5.8 U5.9 U5.10

## Polygon pours and split planes (outlines as drawn)
COM on Ground Plane (split plane): 270.4,-1314.9 -4014.4,-1314.9 -4014.4,1474.9 270.4,1474.9
INPUT on Power Plane (split plane): 270.4,-1314.9 -4014.4,-1314.9 -4014.4,1474.9 270.4,1474.9

## Keep-outs
Keep-Out Layer:
  the board outline again, w10

## Silkscreen, mask and mechanical layers (free items; w line width, h text height)
Top Overlay:
  drawing of 299 lines, arcs and shapes, not listed
Mechanical 1:
  lines w0.5: -4034.5,-269.5 -4034.5,430.5 ; -4034.5,-1335 290.5,-1335 290.5,1495 -4034.5,1495 -4034.5,-1335